# Allegro board JLINKtoSWD_V10.brd
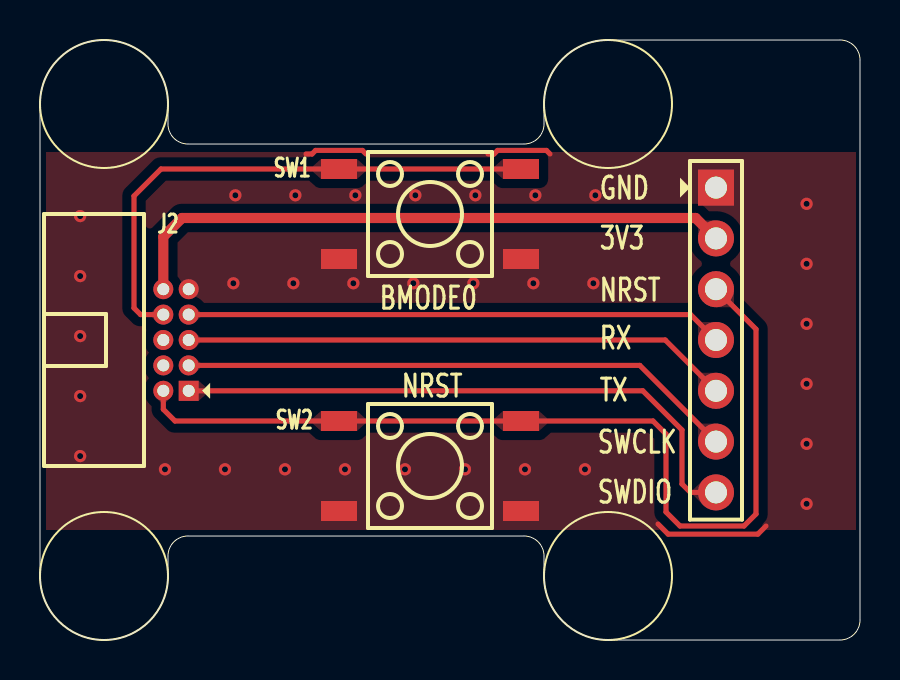
[diagram p0: board, top side]
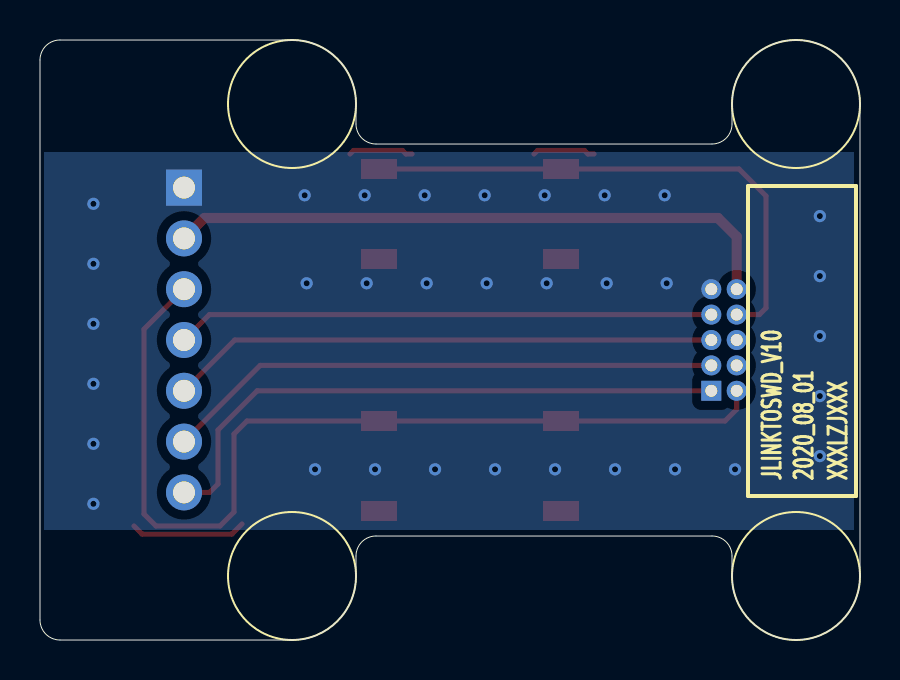
[diagram p1: board, bottom side, seen from below]

Outline 41 x 30 mm; copper layers: TOP, BOTTOM. Coordinates in mm from the lower left corner of the outline.
Outline path: 0,26.8 0,3.2 arc(0.94,0.94) 3.2,0 arc(5.46,0.94) 6.4,3.2 6.4,4.2 arc(6.69,4.91) 7.4,5.2 24.2,5.2 arc(24.91,4.91) 25.2,4.2 25.2,3.2 arc(26.14,0.94) 28.4,0 40,0 arc(40.71,0.29) 41,1 41,29 arc(40.71,29.71) 40,30 28.4,30 arc(26.14,29.06) 25.2,26.8 25.2,25.8 arc(24.91,25.09) 24.2,24.8 7.4,24.8 arc(6.69,25.09) 6.4,25.8 6.4,26.8 arc(5.46,29.06) 3.2,30 arc(0.94,29.06) 0,26.8

## Design rules (mm)
constraint set DEFAULT: min track width 0.203, pair gap 0.203

## Placement (name value [footprint] x y rotation side)
J1  -  [CN1X7-2P54-Z]  33.8 22.62 270 top
J2  -  [DC3-10P-Z-L]  6.8 15 270 top
NOREF  -  []  0 0 90 top
NOREF#2  -  []  0 0 0 top
SW1  -  [K2-1102SP-M4SC-04]  19.5 21.3 0 top
SW2  -  [K2-1102SP-M4SC-04]  19.5 8.7 0 top

## Library data of the parts
J1 = CONN RCPT 7
J2 = DC3-10P-Z-L
SW1 SW2 = SWITCH-SPST-4P

## Footprints (pads in the part's own frame, mm; a bottom-side part is the same pattern mirrored in y, then rotated)
CN1X7-2P54-Z
  rect 1.8x1.8 hole 1.1: 1(0,0)
  round 1.8 hole 1.1: 2(2.54,0) 3(5.08,0) 4(7.62,0) 5(10.16,0) 6(12.7,0) 7(15.24,0)
DC3-10P-Z-L
  rect 1x1 hole 0.6: 1(2.54,0.635)
  round 1 hole 0.6: 2(2.54,-0.635) 3(1.27,0.635) 4(1.27,-0.635) 5(0,0.635) 6(0,-0.635) 7(-1.27,0.635) 8(-1.27,-0.635) 9(-2.54,0.635) 10(-2.54,-0.635)
K2-1102SP-M4SC-04
  rect 1.8x1 smd: 1(-4.55,2.25) 2(4.55,2.25) 3(-4.55,-2.25) 4(4.55,-2.25)

## Nets
GND: J1.1 J2.9 SW1.3 SW1.4 SW2.3 SW2.4
VCC_3.3V: J1.2 J2.10
SWD0_CLK: J1.6 J2.3
SWD0_DATA: J1.7 J2.1
SYS_BMODE0: J2.8 SW1.1 SW1.2
SYS_HWRST_N: J1.3 J2.2 SW2.1 SW2.2
UART0_RX_N: J1.4 J2.7
UART0_TX_N: J1.5 J2.5

Pads without a net: J2 4 6

## Via types
v1: diameter 0.61, hole 0.305, TOP to BOTTOM, 33 vias

## Routing (per net, layer and track width the routed paths; a pad name or vN(x,y) marks a point on that pad's centre or on a via; arc(x,y) is an arc through that point)
GND: length 12.2
  TOP w0.254: 30.9,5.8 31.41,5.29 35.89,5.29 36.3,5.7 ; 22.4,24.3 22.7,24.3 22.88,24.48 25.32,24.48 25.5,24.3 ; 16.3,24.3 16.12,24.48 13.78,24.48 13.6,24.3 13.3,24.3
  vias: v1(2.01,21.2) v1(2.01,18.2) v1(2.01,15.2) v1(2.01,12.2) v1(2.01,9.2) v1(6.25,8.54) v1(9.25,8.54) v1(9.67,17.84) v1(9.77,22.24) v1(12.25,8.54) v1(12.67,17.84) v1(12.77,22.24) v1(15.25,8.54) v1(15.67,17.84) v1(15.77,22.24) v1(18.25,8.54) v1(18.67,17.84) v1(18.77,22.24) v1(21.25,8.54) v1(21.67,17.84) v1(21.77,22.24) v1(24.25,8.54) v1(24.67,17.84) v1(24.77,22.24) v1(27.25,8.54) v1(27.67,17.84) v1(27.77,22.24) v1(38.33,21.81) v1(38.33,18.81) v1(38.33,15.81) v1(38.33,12.81) v1(38.33,9.81) v1(38.33,6.81)
VCC_3.3V: length 31.1
  TOP w0.508: J1.2 32.78,21.1 7.1,21.1 6.17,20.16 J2.10
SWD0_CLK: length 27.9
  TOP w0.254: J1.6 29.99,13.73 J2.3
SWD0_DATA: length 30.1
  TOP w0.254: J1.7 32.52,7.38 32.1,7.8 32.1,10.5 30.14,12.46 J2.1
SYS_BMODE0: length 27.1
  TOP w0.254: J2.8 5.03,16.27 4.7,16.6 4.7,22.2 6.05,23.55 SW1.1 SW1.2
SYS_HWRST_N: length 47.6
  TOP w0.254: J2.2 6.17,11.54 6.75,10.95 SW2.1 SW2.2 30.65,10.95 31.3,10.3 31.3,6.4 32,5.7 35.2,5.7 35.8,6.3 35.8,15.54 J1.3
UART0_RX_N: length 26.9
  TOP w0.254: J1.4 32.53,16.27 J2.7
UART0_TX_N: length 27.4
  TOP w0.254: J1.5 31.26,15 J2.5

## Copper pours and planes (outline as drawn; the poured copper is in the pictures)
GND on TOP: 0.3,24.4 0.3,5.5 40.8,5.5 40.8,24.4 ; 9 cut-outs
GND on BOTTOM: 0.3,24.4 0.3,5.5 40.8,5.5 40.8,24.4

Small or netless copper shapes (teardrops, artwork), in the pictures only: 20 on TOP

## Text on the board
Ref Des/Silkscreen Bottom: XXXLZJXXX | 2020_08_01 | JLINKTOSWD_V10
Ref Des/Silkscreen Top: BMODE0 | NRST | SWCLK | SWDIO | GND | 3V3 | RX | TX
DEVICE_TYPE_TOP: FIGURE | FINISHED_SIZE | 0.3048 | 0.6 | 1.1 | DRILL CHART: TOP to BOTTOM | ALL UNITS ARE IN MILLIMETERS | PLATED | QTY | 33 | 10 | 7 | 50 | TOTAL HOLES:
